# Altium PCB S52最小系统.PcbDoc (part 5 of 9)
Units mm, origin at the board's own origin, x right, y up, seen from the top; angles counter-clockwise.
Board outline 152.4 x 101.6 mm, 2 copper layers (Top Layer, Bottom Layer); 29 components, 53 nets, 176 pads, 2 vias.
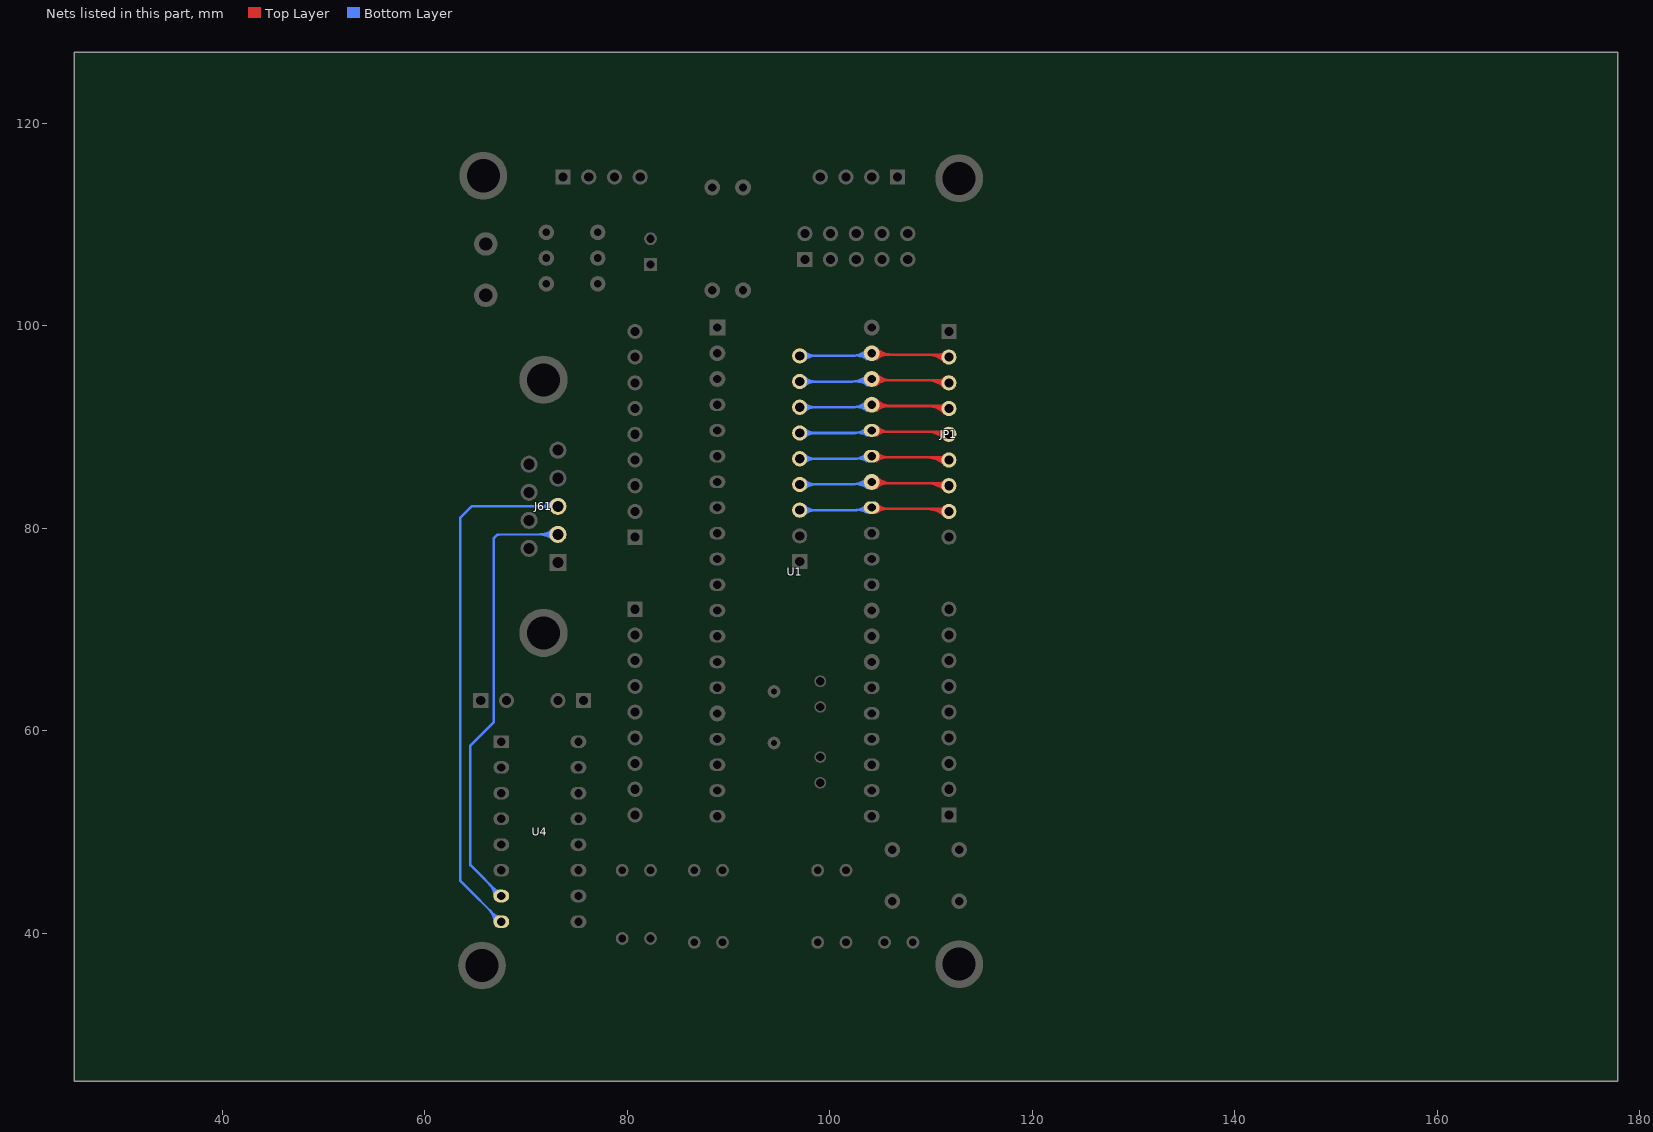
[diagram p5: the nets of this part, all layers, seen from the top]

## Via types
v1: diameter 1.27, hole 0.711, Top Layer to Bottom Layer, 2 vias

## Nets (pads, with @x,y where several pads share a name; then routed paths per layer and width w, separated by ;. In a path a pad name is that pad's centre, name@x,y a point inside that pad or via, vN(x,y) a via of type N, cw(c..) or ccw(c..) an arc to the next point about the centre after c; other vN are vias at no path point) (continued)
NetJ61_2: J61.2 U4.7 | length 115.4
  Bottom Layer w0.254: U4.7@67.56,43.687 64.516,46.731 64.516,58.547 66.802,60.833 66.802,78.994 67.183,79.375 67.31,79.375 J61.2@73.15,79.399 ; 66.433,44.814 cw(c65.305,43.687) U4.7@66.9,43.687 ; 66.433,44.814 cw(c65.305,43.687) U4.7@66.9,43.687 ; 66.433,44.814 cw(c65.305,43.687) U4.7@66.9,43.687 ; 66.433,44.814 cw(c65.305,43.687) U4.7@66.9,43.687 ; 66.433,44.814 cw(c65.305,43.687) U4.7@66.9,43.687 ; 66.433,44.814 cw(c65.305,43.687) U4.7@66.9,43.687 ; 66.433,44.814 cw(c65.305,43.687) U4.7@66.9,43.687 ; 66.433,44.814 cw(c65.305,43.687) U4.7@66.9,43.687 ; 66.433,44.814 cw(c65.305,43.687) U4.7@66.9,43.687 ; 66.433,44.814 cw(c65.305,43.687) U4.7@66.9,43.687 ; 66.825,44.422 ccw(c67.398,44.995) U4.7@67.398,44.185 ; 66.825,44.422 ccw(c67.398,44.995) U4.7@67.398,44.185 ; 66.825,44.422 ccw(c67.398,44.995) U4.7@67.398,44.185 ; 66.825,44.422 ccw(c67.398,44.995) U4.7@67.398,44.185 ; 66.825,44.422 ccw(c67.398,44.995) U4.7@67.398,44.185 ; 66.825,44.422 ccw(c67.398,44.995) U4.7@67.398,44.185 ; 66.825,44.422 ccw(c67.398,44.995) U4.7@67.398,44.185 ; 66.825,44.422 ccw(c67.398,44.995) U4.7@67.398,44.185 ; 66.825,44.422 ccw(c67.398,44.995) U4.7@67.398,44.185 ; 66.825,44.422 ccw(c67.398,44.995) U4.7@67.398,44.185 ; 66.866,44.381 cw(c66.173,43.687) U4.7@67.154,43.687 ; 66.866,44.381 cw(c66.173,43.687) U4.7@67.154,43.687 ; 66.866,44.381 cw(c66.173,43.687) U4.7@67.154,43.687 ; 66.866,44.381 cw(c66.173,43.687) U4.7@67.154,43.687 ; 66.866,44.381 cw(c66.173,43.687) U4.7@67.154,43.687 ; 66.866,44.381 cw(c66.173,43.687) U4.7@67.154,43.687 ; 66.866,44.381 cw(c66.173,43.687) U4.7@67.154,43.687 ; 66.866,44.381 cw(c66.173,43.687) U4.7@67.154,43.687 ; 66.866,44.381 cw(c66.173,43.687) U4.7@67.154,43.687 ; 66.866,44.381 cw(c66.173,43.687) U4.7@67.154,43.687 ; 71.417,79.392 cw(c71.424,77.658) J61.2@72.644,78.889 ; 71.417,79.392 ccw(c71.409,81.125) J61.2@72.64,79.905 ; 71.417,79.392 cw(c71.424,77.658) J61.2@72.644,78.889 ; 71.417,79.392 ccw(c71.409,81.125) J61.2@72.64,79.905 ; 71.417,79.392 cw(c71.424,77.658) J61.2@72.644,78.889 ; 71.417,79.392 ccw(c71.409,81.125) J61.2@72.64,79.905 ; 71.417,79.392 ccw(c71.409,81.125) J61.2@72.64,79.905 ; 71.417,79.392 cw(c71.424,77.658) J61.2@72.644,78.889 ; 71.417,79.392 ccw(c71.409,81.125) J61.2@72.64,79.905 ; 71.417,79.392 cw(c71.424,77.658) J61.2@72.644,78.889 ; 71.417,79.392 ccw(c71.409,81.125) J61.2@72.64,79.905 ; 71.417,79.392 cw(c71.424,77.658) J61.2@72.644,78.889 ; 71.417,79.392 ccw(c71.409,81.125) J61.2@72.64,79.905 ; 71.417,79.392 cw(c71.424,77.658) J61.2@72.644,78.889 ; 71.417,79.392 ccw(c71.409,81.125) J61.2@72.64,79.905 ; 71.417,79.392 cw(c71.424,77.658) J61.2@72.644,78.889 ; 71.417,79.392 ccw(c71.409,81.125) J61.2@72.64,79.905 ; 71.417,79.392 cw(c71.424,77.658) J61.2@72.644,78.889 ; 71.417,79.392 ccw(c71.409,81.125) J61.2@72.64,79.905 ; 71.417,79.392 cw(c71.424,77.658) J61.2@72.644,78.889 ; 72.03,79.394 cw(c72.034,78.274) J61.2@72.823,79.07 ; 72.03,79.394 ccw(c72.025,80.515) J61.2@72.821,79.726 ; 72.03,79.394 cw(c72.034,78.274) J61.2@72.823,79.07 ; 72.03,79.394 ccw(c72.025,80.515) J61.2@72.821,79.726 ; 72.03,79.394 cw(c72.034,78.274) J61.2@72.823,79.07 ; 72.03,79.394 ccw(c72.025,80.515) J61.2@72.821,79.726 ; 72.03,79.394 ccw(c72.025,80.515) J61.2@72.821,79.726 ; 72.03,79.394 cw(c72.034,78.274) J61.2@72.823,79.07 ; 72.03,79.394 ccw(c72.025,80.515) J61.2@72.821,79.726 ; 72.03,79.394 cw(c72.034,78.274) J61.2@72.823,79.07 ; 72.03,79.394 ccw(c72.025,80.515) J61.2@72.821,79.726 ; 72.03,79.394 cw(c72.034,78.274) J61.2@72.823,79.07 ; 72.03,79.394 ccw(c72.025,80.515) J61.2@72.821,79.726 ; 72.03,79.394 cw(c72.034,78.274) J61.2@72.823,79.07 ; 72.03,79.394 ccw(c72.025,80.515) J61.2@72.821,79.726 ; 72.03,79.394 cw(c72.034,78.274) J61.2@72.823,79.07 ; 72.03,79.394 ccw(c72.025,80.515) J61.2@72.821,79.726 ; 72.03,79.394 cw(c72.034,78.274) J61.2@72.823,79.07 ; 72.03,79.394 ccw(c72.025,80.515) J61.2@72.821,79.726 ; 72.03,79.394 cw(c72.034,78.274) J61.2@72.823,79.07
NetJ61_3: J61.3 U4.8 | length 123.1
  Bottom Layer w0.254: U4.8@67.56,41.147 63.5,45.207 63.5,81.026 64.643,82.169 J61.3@73.15,82.169 ; 66.433,42.274 cw(c65.305,41.147) U4.8@66.9,41.147 ; 66.433,42.274 cw(c65.305,41.147) U4.8@66.9,41.147 ; 66.433,42.274 cw(c65.305,41.147) U4.8@66.9,41.147 ; 66.433,42.274 cw(c65.305,41.147) U4.8@66.9,41.147 ; 66.433,42.274 cw(c65.305,41.147) U4.8@66.9,41.147 ; 66.433,42.274 cw(c65.305,41.147) U4.8@66.9,41.147 ; 66.433,42.274 cw(c65.305,41.147) U4.8@66.9,41.147 ; 66.433,42.274 cw(c65.305,41.147) U4.8@66.9,41.147 ; 66.433,42.274 cw(c65.305,41.147) U4.8@66.9,41.147 ; 66.433,42.274 cw(c65.305,41.147) U4.8@66.9,41.147 ; 66.825,41.882 ccw(c67.398,42.455) U4.8@67.398,41.645 ; 66.825,41.882 ccw(c67.398,42.455) U4.8@67.398,41.645 ; 66.825,41.882 ccw(c67.398,42.455) U4.8@67.398,41.645 ; 66.825,41.882 ccw(c67.398,42.455) U4.8@67.398,41.645 ; 66.825,41.882 ccw(c67.398,42.455) U4.8@67.398,41.645 ; 66.825,41.882 ccw(c67.398,42.455) U4.8@67.398,41.645 ; 66.825,41.882 ccw(c67.398,42.455) U4.8@67.398,41.645 ; 66.825,41.882 ccw(c67.398,42.455) U4.8@67.398,41.645 ; 66.825,41.882 ccw(c67.398,42.455) U4.8@67.398,41.645 ; 66.825,41.882 ccw(c67.398,42.455) U4.8@67.398,41.645 ; 66.866,41.841 cw(c66.173,41.147) U4.8@67.154,41.147 ; 66.866,41.841 cw(c66.173,41.147) U4.8@67.154,41.147 ; 66.866,41.841 cw(c66.173,41.147) U4.8@67.154,41.147 ; 66.866,41.841 cw(c66.173,41.147) U4.8@67.154,41.147 ; 66.866,41.841 cw(c66.173,41.147) U4.8@67.154,41.147 ; 66.866,41.841 cw(c66.173,41.147) U4.8@67.154,41.147 ; 66.866,41.841 cw(c66.173,41.147) U4.8@67.154,41.147 ; 66.866,41.841 cw(c66.173,41.147) U4.8@67.154,41.147 ; 66.866,41.841 cw(c66.173,41.147) U4.8@67.154,41.147 ; 66.866,41.841 cw(c66.173,41.147) U4.8@67.154,41.147 ; 71.417,82.169 cw(c71.417,80.436) J61.3@72.642,81.661 ; 71.417,82.169 ccw(c71.417,83.902) J61.3@72.642,82.677 ; 71.417,82.169 cw(c71.417,80.436) J61.3@72.642,81.661 ; 71.417,82.169 ccw(c71.417,83.902) J61.3@72.642,82.677 ; 71.417,82.169 cw(c71.417,80.436) J61.3@72.642,81.661 ; 71.417,82.169 ccw(c71.417,83.902) J61.3@72.642,82.677 ; 71.417,82.169 ccw(c71.417,83.902) J61.3@72.642,82.677 ; 71.417,82.169 cw(c71.417,80.436) J61.3@72.642,81.661 ; 71.417,82.169 ccw(c71.417,83.902) J61.3@72.642,82.677 ; 71.417,82.169 cw(c71.417,80.436) J61.3@72.642,81.661 ; 71.417,82.169 ccw(c71.417,83.902) J61.3@72.642,82.677 ; 71.417,82.169 cw(c71.417,80.436) J61.3@72.642,81.661 ; 71.417,82.169 ccw(c71.417,83.902) J61.3@72.642,82.677 ; 71.417,82.169 cw(c71.417,80.436) J61.3@72.642,81.661 ; 71.417,82.169 ccw(c71.417,83.902) J61.3@72.642,82.677 ; 71.417,82.169 cw(c71.417,80.436) J61.3@72.642,81.661 ; 71.417,82.169 ccw(c71.417,83.902) J61.3@72.642,82.677 ; 71.417,82.169 cw(c71.417,80.436) J61.3@72.642,81.661 ; 71.417,82.169 ccw(c71.417,83.902) J61.3@72.642,82.677 ; 71.417,82.169 cw(c71.417,80.436) J61.3@72.642,81.661 ; 72.03,82.169 cw(c72.03,81.049) J61.3@72.822,81.841 ; 72.03,82.169 ccw(c72.03,83.289) J61.3@72.822,82.497 ; 72.03,82.169 cw(c72.03,81.049) J61.3@72.822,81.841 ; 72.03,82.169 ccw(c72.03,83.289) J61.3@72.822,82.497 ; 72.03,82.169 cw(c72.03,81.049) J61.3@72.822,81.841 ; 72.03,82.169 ccw(c72.03,83.289) J61.3@72.822,82.497 ; 72.03,82.169 ccw(c72.03,83.289) J61.3@72.822,82.497 ; 72.03,82.169 cw(c72.03,81.049) J61.3@72.822,81.841 ; 72.03,82.169 ccw(c72.03,83.289) J61.3@72.822,82.497 ; 72.03,82.169 cw(c72.03,81.049) J61.3@72.822,81.841 ; 72.03,82.169 ccw(c72.03,83.289) J61.3@72.822,82.497 ; 72.03,82.169 cw(c72.03,81.049) J61.3@72.822,81.841 ; 72.03,82.169 ccw(c72.03,83.289) J61.3@72.822,82.497 ; 72.03,82.169 cw(c72.03,81.049) J61.3@72.822,81.841 ; 72.03,82.169 ccw(c72.03,83.289) J61.3@72.822,82.497 ; 72.03,82.169 cw(c72.03,81.049) J61.3@72.822,81.841 ; 72.03,82.169 ccw(c72.03,83.289) J61.3@72.822,82.497 ; 72.03,82.169 cw(c72.03,81.049) J61.3@72.822,81.841 ; 72.03,82.169 ccw(c72.03,83.289) J61.3@72.822,82.497 ; 72.03,82.169 cw(c72.03,81.049) J61.3@72.822,81.841
NetJP1_2: ?.9 JP1.2 U1.39 | length 116.7
  Top Layer w0.254: U1.39@104.136,97.154 111.507,97.154 JP1.2@111.76,96.901 ; U1.39@104.424,96.867 cw(c105.117,96.173) 105.117,97.154 ; U1.39@104.424,96.867 cw(c105.117,96.173) 105.117,97.154 ; U1.39@104.424,96.867 cw(c105.117,96.173) 105.117,97.154 ; U1.39@104.424,96.867 cw(c105.117,96.173) 105.117,97.154 ; U1.39@104.424,96.867 cw(c105.117,96.173) 105.117,97.154 ; U1.39@104.424,96.867 cw(c105.117,96.173) 105.117,97.154 ; U1.39@104.424,97.441 ccw(c105.117,98.135) 105.117,97.154 ; U1.39@104.424,97.441 ccw(c105.117,98.135) 105.117,97.154 ; U1.39@104.424,97.441 ccw(c105.117,98.135) 105.117,97.154 ; U1.39@104.424,97.441 ccw(c105.117,98.135) 105.117,97.154 ; U1.39@104.424,97.441 ccw(c105.117,98.135) 105.117,97.154 ; U1.39@104.424,97.441 ccw(c105.117,98.135) 105.117,97.154 ; U1.39@104.424,97.568 ccw(c105.424,98.569) 105.424,97.154 ; U1.39@104.424,97.568 ccw(c105.424,98.569) 105.424,97.154 ; U1.39@104.424,97.568 ccw(c105.424,98.569) 105.424,97.154 ; U1.39@104.424,97.568 ccw(c105.424,98.569) 105.424,97.154 ; U1.39@104.603,96.687 cw(c105.731,95.56) 105.731,97.154 ; U1.39@104.603,96.687 cw(c105.731,95.56) 105.731,97.154 ; U1.39@104.603,96.687 cw(c105.731,95.56) 105.731,97.154 ; U1.39@104.603,96.687 cw(c105.731,95.56) 105.731,97.154 ; U1.39@104.603,96.687 cw(c105.731,95.56) 105.731,97.154 ; U1.39@104.603,96.687 cw(c105.731,95.56) 105.731,97.154 ; U1.39@104.603,96.814 cw(c105.424,95.993) 105.424,97.154 ; U1.39@104.603,96.814 cw(c105.424,95.993) 105.424,97.154 ; U1.39@104.603,96.814 cw(c105.424,95.993) 105.424,97.154 ; U1.39@104.603,96.814 cw(c105.424,95.993) 105.424,97.154 ; U1.39@104.603,97.621 ccw(c105.731,98.748) 105.731,97.154 ; U1.39@104.603,97.621 ccw(c105.731,98.748) 105.731,97.154 ; U1.39@104.603,97.621 ccw(c105.731,98.748) 105.731,97.154 ; U1.39@104.603,97.621 ccw(c105.731,98.748) 105.731,97.154 ; U1.39@104.603,97.621 ccw(c105.731,98.748) 105.731,97.154 ; U1.39@104.603,97.621 ccw(c105.731,98.748) 105.731,97.154 ; U1.39@104.603,97.748 ccw(c106.037,99.182) 106.037,97.154 ; U1.39@104.603,97.748 ccw(c106.037,99.182) 106.037,97.154 ; U1.39@104.603,97.748 ccw(c106.037,99.182) 106.037,97.154 ; U1.39@104.603,97.748 ccw(c106.037,99.182) 106.037,97.154 ; 109.645,97.154 cw(c109.645,94.786) JP1.2@111.319,96.46 ; 109.645,97.154 cw(c109.645,94.786) JP1.2@111.319,96.46 ; 109.645,97.154 cw(c109.645,94.786) JP1.2@111.319,96.46 ; 109.645,97.154 cw(c109.645,94.786) JP1.2@111.319,96.46 ; 109.645,97.154 cw(c109.645,94.786) JP1.2@111.319,96.46 ; 109.645,97.154 cw(c109.645,94.786) JP1.2@111.319,96.46 ; 109.645,97.154 cw(c109.645,94.786) JP1.2@111.319,96.46 ; 109.645,97.154 cw(c109.645,94.786) JP1.2@111.319,96.46 ; 109.645,97.154 cw(c109.645,94.786) JP1.2@111.319,96.46 ; 109.645,97.154 cw(c109.645,94.786) JP1.2@111.319,96.46 ; 110.258,97.154 cw(c110.258,95.399) JP1.2@111.499,96.64 ; 110.258,97.154 cw(c110.258,95.399) JP1.2@111.499,96.64 ; 110.258,97.154 cw(c110.258,95.399) JP1.2@111.499,96.64 ; 110.258,97.154 cw(c110.258,95.399) JP1.2@111.499,96.64 ; 110.258,97.154 cw(c110.258,95.399) JP1.2@111.499,96.64 ; 110.258,97.154 cw(c110.258,95.399) JP1.2@111.499,96.64 ; 110.258,97.154 cw(c110.258,95.399) JP1.2@111.499,96.64 ; 110.258,97.154 cw(c110.258,95.399) JP1.2@111.499,96.64 ; 110.258,97.154 cw(c110.258,95.399) JP1.2@111.499,96.64 ; 110.258,97.154 cw(c110.258,95.399) JP1.2@111.499,96.64 ; 110.867,97.154 ccw(c110.867,97.794) JP1.2@111.319,97.342 ; 110.867,97.154 ccw(c110.867,97.794) JP1.2@111.319,97.342 ; 110.867,97.154 ccw(c110.867,97.794) JP1.2@111.319,97.342 ; 110.867,97.154 ccw(c110.867,97.794) JP1.2@111.319,97.342 ; 110.867,97.154 ccw(c110.867,97.794) JP1.2@111.319,97.342 ; 110.867,97.154 ccw(c110.867,97.794) JP1.2@111.319,97.342 ; 110.867,97.154 ccw(c110.867,97.794) JP1.2@111.319,97.342 ; 110.867,97.154 ccw(c110.867,97.794) JP1.2@111.319,97.342 ; 110.867,97.154 ccw(c110.867,97.794) JP1.2@111.319,97.342 ; 110.867,97.154 ccw(c110.867,97.794) JP1.2@111.319,97.342 ; 110.872,97.154 cw(c110.872,96.013) JP1.2@111.679,96.82 ; 110.872,97.154 cw(c110.872,96.013) JP1.2@111.679,96.82 ; 110.872,97.154 cw(c110.872,96.013) JP1.2@111.679,96.82 ; 110.872,97.154 cw(c110.872,96.013) JP1.2@111.679,96.82 ; 110.872,97.154 cw(c110.872,96.013) JP1.2@111.679,96.82 ; 110.872,97.154 cw(c110.872,96.013) JP1.2@111.679,96.82 ; 110.872,97.154 cw(c110.872,96.013) JP1.2@111.679,96.82 ; 110.872,97.154 cw(c110.872,96.013) JP1.2@111.679,96.82 ; 110.872,97.154 cw(c110.872,96.013) JP1.2@111.679,96.82 ; 110.872,97.154 cw(c110.872,96.013) JP1.2@111.679,96.82
  Bottom Layer w0.254: ?.9@97.028,97.028 102.238,97.028 ccw(c102.238,99.053) U1.39@103.669,97.621 ; 102.846,97.028 cw(c102.846,95.864) U1.39@103.669,96.687 ; 102.851,97.028 ccw(c102.851,98.439) U1.39@103.849,97.441 ; ?.9@97.289,96.767 cw(c97.919,96.137) 97.919,97.028 ; ?.9@97.289,96.767 cw(c97.919,96.137) 97.919,97.028 ; ?.9@97.289,96.767 cw(c97.919,96.137) 97.919,97.028 ; ?.9@97.289,96.767 cw(c97.919,96.137) 97.919,97.028 ; ?.9@97.289,97.289 ccw(c97.919,97.919) 97.919,97.028 ; ?.9@97.289,97.289 ccw(c97.919,97.919) 97.919,97.028 ; ?.9@97.289,97.289 ccw(c97.919,97.919) 97.919,97.028 ; ?.9@97.289,97.289 ccw(c97.919,97.919) 97.919,97.028 ; ?.9@97.469,96.587 cw(c98.532,95.524) 98.532,97.028 ; ?.9@97.469,96.587 cw(c98.532,95.524) 98.532,97.028 ; ?.9@97.469,96.587 cw(c98.532,95.524) 98.532,97.028 ; ?.9@97.469,96.587 cw(c98.532,95.524) 98.532,97.028 ; ?.9@97.469,97.469 ccw(c98.532,98.532) 98.532,97.028 ; ?.9@97.469,97.469 ccw(c98.532,98.532) 98.532,97.028 ; ?.9@97.469,97.469 ccw(c98.532,98.532) 98.532,97.028 ; ?.9@97.469,97.469 ccw(c98.532,98.532) 98.532,97.028
NetJP1_3: ?.8 JP1.3 U1.38 | length 116.7
  Top Layer w0.254: U1.38@104.136,94.614 111.507,94.614 JP1.3@111.76,94.361 ; U1.38@104.424,94.327 cw(c105.117,93.633) 105.117,94.614 ; U1.38@104.424,94.327 cw(c105.117,93.633) 105.117,94.614 ; U1.38@104.424,94.327 cw(c105.117,93.633) 105.117,94.614 ; U1.38@104.424,94.327 cw(c105.117,93.633) 105.117,94.614 ; U1.38@104.424,94.327 cw(c105.117,93.633) 105.117,94.614 ; U1.38@104.424,94.327 cw(c105.117,93.633) 105.117,94.614 ; U1.38@104.424,94.901 ccw(c105.117,95.595) 105.117,94.614 ; U1.38@104.424,94.901 ccw(c105.117,95.595) 105.117,94.614 ; U1.38@104.424,94.901 ccw(c105.117,95.595) 105.117,94.614 ; U1.38@104.424,94.901 ccw(c105.117,95.595) 105.117,94.614 ; U1.38@104.424,94.901 ccw(c105.117,95.595) 105.117,94.614 ; U1.38@104.424,94.901 ccw(c105.117,95.595) 105.117,94.614 ; U1.38@104.424,95.028 ccw(c105.424,96.029) 105.424,94.614 ; U1.38@104.424,95.028 ccw(c105.424,96.029) 105.424,94.614 ; U1.38@104.424,95.028 ccw(c105.424,96.029) 105.424,94.614 ; U1.38@104.424,95.028 ccw(c105.424,96.029) 105.424,94.614 ; U1.38@104.603,94.147 cw(c105.731,93.02) 105.731,94.614 ; U1.38@104.603,94.147 cw(c105.731,93.02) 105.731,94.614 ; U1.38@104.603,94.147 cw(c105.731,93.02) 105.731,94.614 ; U1.38@104.603,94.147 cw(c105.731,93.02) 105.731,94.614 ; U1.38@104.603,94.147 cw(c105.731,93.02) 105.731,94.614 ; U1.38@104.603,94.147 cw(c105.731,93.02) 105.731,94.614 ; U1.38@104.603,94.274 cw(c105.424,93.453) 105.424,94.614 ; U1.38@104.603,94.274 cw(c105.424,93.453) 105.424,94.614 ; U1.38@104.603,94.274 cw(c105.424,93.453) 105.424,94.614 ; U1.38@104.603,94.274 cw(c105.424,93.453) 105.424,94.614 ; U1.38@104.603,95.081 ccw(c105.731,96.208) 105.731,94.614 ; U1.38@104.603,95.081 ccw(c105.731,96.208) 105.731,94.614 ; U1.38@104.603,95.081 ccw(c105.731,96.208) 105.731,94.614 ; U1.38@104.603,95.081 ccw(c105.731,96.208) 105.731,94.614 ; U1.38@104.603,95.081 ccw(c105.731,96.208) 105.731,94.614 ; U1.38@104.603,95.081 ccw(c105.731,96.208) 105.731,94.614 ; U1.38@104.603,95.208 ccw(c106.037,96.642) 106.037,94.614 ; U1.38@104.603,95.208 ccw(c106.037,96.642) 106.037,94.614 ; U1.38@104.603,95.208 ccw(c106.037,96.642) 106.037,94.614 ; U1.38@104.603,95.208 ccw(c106.037,96.642) 106.037,94.614 ; 109.645,94.614 cw(c109.645,92.246) JP1.3@111.319,93.92 ; 109.645,94.614 cw(c109.645,92.246) JP1.3@111.319,93.92 ; 109.645,94.614 cw(c109.645,92.246) JP1.3@111.319,93.92 ; 109.645,94.614 cw(c109.645,92.246) JP1.3@111.319,93.92 ; 109.645,94.614 cw(c109.645,92.246) JP1.3@111.319,93.92 ; 109.645,94.614 cw(c109.645,92.246) JP1.3@111.319,93.92 ; 109.645,94.614 cw(c109.645,92.246) JP1.3@111.319,93.92 ; 109.645,94.614 cw(c109.645,92.246) JP1.3@111.319,93.92 ; 109.645,94.614 cw(c109.645,92.246) JP1.3@111.319,93.92 ; 109.645,94.614 cw(c109.645,92.246) JP1.3@111.319,93.92 ; 110.258,94.614 cw(c110.258,92.859) JP1.3@111.499,94.1 ; 110.258,94.614 cw(c110.258,92.859) JP1.3@111.499,94.1 ; 110.258,94.614 cw(c110.258,92.859) JP1.3@111.499,94.1 ; 110.258,94.614 cw(c110.258,92.859) JP1.3@111.499,94.1 ; 110.258,94.614 cw(c110.258,92.859) JP1.3@111.499,94.1 ; 110.258,94.614 cw(c110.258,92.859) JP1.3@111.499,94.1 ; 110.258,94.614 cw(c110.258,92.859) JP1.3@111.499,94.1 ; 110.258,94.614 cw(c110.258,92.859) JP1.3@111.499,94.1 ; 110.258,94.614 cw(c110.258,92.859) JP1.3@111.499,94.1 ; 110.258,94.614 cw(c110.258,92.859) JP1.3@111.499,94.1 ; 110.867,94.614 ccw(c110.867,95.254) JP1.3@111.319,94.802 ; 110.867,94.614 ccw(c110.867,95.254) JP1.3@111.319,94.802 ; 110.867,94.614 ccw(c110.867,95.254) JP1.3@111.319,94.802 ; 110.867,94.614 ccw(c110.867,95.254) JP1.3@111.319,94.802 ; 110.867,94.614 ccw(c110.867,95.254) JP1.3@111.319,94.802 ; 110.867,94.614 ccw(c110.867,95.254) JP1.3@111.319,94.802 ; 110.867,94.614 ccw(c110.867,95.254) JP1.3@111.319,94.802 ; 110.867,94.614 ccw(c110.867,95.254) JP1.3@111.319,94.802 ; 110.867,94.614 ccw(c110.867,95.254) JP1.3@111.319,94.802 ; 110.867,94.614 ccw(c110.867,95.254) JP1.3@111.319,94.802 ; 110.872,94.614 cw(c110.872,93.473) JP1.3@111.679,94.28 ; 110.872,94.614 cw(c110.872,93.473) JP1.3@111.679,94.28 ; 110.872,94.614 cw(c110.872,93.473) JP1.3@111.679,94.28 ; 110.872,94.614 cw(c110.872,93.473) JP1.3@111.679,94.28 ; 110.872,94.614 cw(c110.872,93.473) JP1.3@111.679,94.28 ; 110.872,94.614 cw(c110.872,93.473) JP1.3@111.679,94.28 ; 110.872,94.614 cw(c110.872,93.473) JP1.3@111.679,94.28 ; 110.872,94.614 cw(c110.872,93.473) JP1.3@111.679,94.28 ; 110.872,94.614 cw(c110.872,93.473) JP1.3@111.679,94.28 ; 110.872,94.614 cw(c110.872,93.473) JP1.3@111.679,94.28
  Bottom Layer w0.254: ?.8@97.028,94.488 102.238,94.488 ccw(c102.238,96.513) U1.38@103.669,95.081 ; 102.846,94.488 cw(c102.846,93.324) U1.38@103.669,94.147 ; 102.851,94.488 ccw(c102.851,95.899) U1.38@103.849,94.901 ; ?.8@97.289,94.227 cw(c97.919,93.597) 97.919,94.488 ; ?.8@97.289,94.227 cw(c97.919,93.597) 97.919,94.488 ; ?.8@97.289,94.227 cw(c97.919,93.597) 97.919,94.488 ; ?.8@97.289,94.227 cw(c97.919,93.597) 97.919,94.488 ; ?.8@97.289,94.749 ccw(c97.919,95.379) 97.919,94.488 ; ?.8@97.289,94.749 ccw(c97.919,95.379) 97.919,94.488 ; ?.8@97.289,94.749 ccw(c97.919,95.379) 97.919,94.488 ; ?.8@97.289,94.749 ccw(c97.919,95.379) 97.919,94.488 ; ?.8@97.469,94.047 cw(c98.532,92.984) 98.532,94.488 ; ?.8@97.469,94.047 cw(c98.532,92.984) 98.532,94.488 ; ?.8@97.469,94.047 cw(c98.532,92.984) 98.532,94.488 ; ?.8@97.469,94.047 cw(c98.532,92.984) 98.532,94.488 ; ?.8@97.469,94.929 ccw(c98.532,95.992) 98.532,94.488 ; ?.8@97.469,94.929 ccw(c98.532,95.992) 98.532,94.488 ; ?.8@97.469,94.929 ccw(c98.532,95.992) 98.532,94.488 ; ?.8@97.469,94.929 ccw(c98.532,95.992) 98.532,94.488
NetJP1_4: ?.7 JP1.4 U1.37 | length 116.9
  Top Layer w0.254: U1.37@104.136,92.074 111.507,92.074 JP1.4@111.76,91.821 ; U1.37@104.424,91.787 cw(c105.117,91.093) 105.117,92.074 ; U1.37@104.424,91.787 cw(c105.117,91.093) 105.117,92.074 ; U1.37@104.424,91.787 cw(c105.117,91.093) 105.117,92.074 ; U1.37@104.424,91.787 cw(c105.117,91.093) 105.117,92.074 ; U1.37@104.424,91.787 cw(c105.117,91.093) 105.117,92.074 ; U1.37@104.424,91.787 cw(c105.117,91.093) 105.117,92.074 ; U1.37@104.424,92.361 ccw(c105.117,93.055) 105.117,92.074 ; U1.37@104.424,92.361 ccw(c105.117,93.055) 105.117,92.074 ; U1.37@104.424,92.361 ccw(c105.117,93.055) 105.117,92.074 ; U1.37@104.424,92.361 ccw(c105.117,93.055) 105.117,92.074 ; U1.37@104.424,92.361 ccw(c105.117,93.055) 105.117,92.074 ; U1.37@104.424,92.361 ccw(c105.117,93.055) 105.117,92.074 ; U1.37@104.424,92.488 ccw(c105.424,93.489) 105.424,92.074 ; U1.37@104.424,92.488 ccw(c105.424,93.489) 105.424,92.074 ; U1.37@104.424,92.488 ccw(c105.424,93.489) 105.424,92.074 ; U1.37@104.424,92.488 ccw(c105.424,93.489) 105.424,92.074 ; U1.37@104.603,91.607 cw(c105.731,90.48) 105.731,92.074 ; U1.37@104.603,91.607 cw(c105.731,90.48) 105.731,92.074 ; U1.37@104.603,91.607 cw(c105.731,90.48) 105.731,92.074 ; U1.37@104.603,91.607 cw(c105.731,90.48) 105.731,92.074 ; U1.37@104.603,91.607 cw(c105.731,90.48) 105.731,92.074 ; U1.37@104.603,91.607 cw(c105.731,90.48) 105.731,92.074 ; U1.37@104.603,91.734 cw(c105.424,90.913) 105.424,92.074 ; U1.37@104.603,91.734 cw(c105.424,90.913) 105.424,92.074 ; U1.37@104.603,91.734 cw(c105.424,90.913) 105.424,92.074 ; U1.37@104.603,91.734 cw(c105.424,90.913) 105.424,92.074 ; U1.37@104.603,92.541 ccw(c105.731,93.668) 105.731,92.074 ; U1.37@104.603,92.541 ccw(c105.731,93.668) 105.731,92.074 ; U1.37@104.603,92.541 ccw(c105.731,93.668) 105.731,92.074 ; U1.37@104.603,92.541 ccw(c105.731,93.668) 105.731,92.074 ; U1.37@104.603,92.541 ccw(c105.731,93.668) 105.731,92.074 ; U1.37@104.603,92.541 ccw(c105.731,93.668) 105.731,92.074 ; U1.37@104.603,92.668 ccw(c106.037,94.102) 106.037,92.074 ; U1.37@104.603,92.668 ccw(c106.037,94.102) 106.037,92.074 ; U1.37@104.603,92.668 ccw(c106.037,94.102) 106.037,92.074 ; U1.37@104.603,92.668 ccw(c106.037,94.102) 106.037,92.074 ; 109.645,92.074 cw(c109.645,89.706) JP1.4@111.319,91.38 ; 109.645,92.074 cw(c109.645,89.706) JP1.4@111.319,91.38 ; 109.645,92.074 cw(c109.645,89.706) JP1.4@111.319,91.38 ; 109.645,92.074 cw(c109.645,89.706) JP1.4@111.319,91.38 ; 109.645,92.074 cw(c109.645,89.706) JP1.4@111.319,91.38 ; 109.645,92.074 cw(c109.645,89.706) JP1.4@111.319,91.38 ; 109.645,92.074 cw(c109.645,89.706) JP1.4@111.319,91.38 ; 109.645,92.074 cw(c109.645,89.706) JP1.4@111.319,91.38 ; 109.645,92.074 cw(c109.645,89.706) JP1.4@111.319,91.38 ; 109.645,92.074 cw(c109.645,89.706) JP1.4@111.319,91.38 ; 110.258,92.074 cw(c110.258,90.319) JP1.4@111.499,91.56 ; 110.258,92.074 cw(c110.258,90.319) JP1.4@111.499,91.56 ; 110.258,92.074 cw(c110.258,90.319) JP1.4@111.499,91.56 ; 110.258,92.074 cw(c110.258,90.319) JP1.4@111.499,91.56 ; 110.258,92.074 cw(c110.258,90.319) JP1.4@111.499,91.56 ; 110.258,92.074 cw(c110.258,90.319) JP1.4@111.499,91.56 ; 110.258,92.074 cw(c110.258,90.319) JP1.4@111.499,91.56 ; 110.258,92.074 cw(c110.258,90.319) JP1.4@111.499,91.56 ; 110.258,92.074 cw(c110.258,90.319) JP1.4@111.499,91.56 ; 110.258,92.074 cw(c110.258,90.319) JP1.4@111.499,91.56 ; 110.867,92.074 ccw(c110.867,92.714) JP1.4@111.319,92.262 ; 110.867,92.074 ccw(c110.867,92.714) JP1.4@111.319,92.262 ; 110.867,92.074 ccw(c110.867,92.714) JP1.4@111.319,92.262 ; 110.867,92.074 ccw(c110.867,92.714) JP1.4@111.319,92.262 ; 110.867,92.074 ccw(c110.867,92.714) JP1.4@111.319,92.262 ; 110.867,92.074 ccw(c110.867,92.714) JP1.4@111.319,92.262 ; 110.867,92.074 ccw(c110.867,92.714) JP1.4@111.319,92.262 ; 110.867,92.074 ccw(c110.867,92.714) JP1.4@111.319,92.262 ; 110.867,92.074 ccw(c110.867,92.714) JP1.4@111.319,92.262 ; 110.867,92.074 ccw(c110.867,92.714) JP1.4@111.319,92.262 ; 110.872,92.074 cw(c110.872,90.933) JP1.4@111.679,91.74 ; 110.872,92.074 cw(c110.872,90.933) JP1.4@111.679,91.74 ; 110.872,92.074 cw(c110.872,90.933) JP1.4@111.679,91.74 ; 110.872,92.074 cw(c110.872,90.933) JP1.4@111.679,91.74 ; 110.872,92.074 cw(c110.872,90.933) JP1.4@111.679,91.74 ; 110.872,92.074 cw(c110.872,90.933) JP1.4@111.679,91.74 ; 110.872,92.074 cw(c110.872,90.933) JP1.4@111.679,91.74 ; 110.872,92.074 cw(c110.872,90.933) JP1.4@111.679,91.74 ; 110.872,92.074 cw(c110.872,90.933) JP1.4@111.679,91.74 ; 110.872,92.074 cw(c110.872,90.933) JP1.4@111.679,91.74
  Bottom Layer w0.254: ?.7@97.028,91.948 102.238,91.948 ccw(c102.238,93.973) U1.37@103.669,92.541 ; 102.846,91.948 cw(c102.846,90.784) U1.37@103.669,91.607 ; 102.851,91.948 ccw(c102.851,93.359) U1.37@103.849,92.361 ; U1.37@104.01,91.948 U1.37@104.136,92.074 ; ?.7@97.289,91.687 cw(c97.919,91.057) 97.919,91.948 ; ?.7@97.289,91.687 cw(c97.919,91.057) 97.919,91.948 ; ?.7@97.289,91.687 cw(c97.919,91.057) 97.919,91.948 ; ?.7@97.289,91.687 cw(c97.919,91.057) 97.919,91.948 ; ?.7@97.289,92.209 ccw(c97.919,92.839) 97.919,91.948 ; ?.7@97.289,92.209 ccw(c97.919,92.839) 97.919,91.948 ; ?.7@97.289,92.209 ccw(c97.919,92.839) 97.919,91.948 ; ?.7@97.289,92.209 ccw(c97.919,92.839) 97.919,91.948 ; ?.7@97.469,91.507 cw(c98.532,90.444) 98.532,91.948 ; ?.7@97.469,91.507 cw(c98.532,90.444) 98.532,91.948 ; ?.7@97.469,91.507 cw(c98.532,90.444) 98.532,91.948 ; ?.7@97.469,91.507 cw(c98.532,90.444) 98.532,91.948 ; ?.7@97.469,92.389 ccw(c98.532,93.452) 98.532,91.948 ; ?.7@97.469,92.389 ccw(c98.532,93.452) 98.532,91.948 ; ?.7@97.469,92.389 ccw(c98.532,93.452) 98.532,91.948 ; ?.7@97.469,92.389 ccw(c98.532,93.452) 98.532,91.948
NetJP1_5: ?.6 JP1.5 U1.36 | length 99.6
  Top Layer w0.254: U1.36@104.136,89.534 111.507,89.534 JP1.5@111.76,89.281 ; U1.36@104.471,89.834 ccw(c105.194,90.557) 105.194,89.534 ; U1.36@104.471,89.834 ccw(c105.194,90.557) 105.194,89.534 ; U1.36@104.471,89.834 ccw(c105.194,90.557) 105.194,89.534 ; U1.36@104.471,89.834 ccw(c105.194,90.557) 105.194,89.534 ; U1.36@104.651,89.182 cw(c105.501,88.332) 105.501,89.534 ; U1.36@104.651,89.182 cw(c105.501,88.332) 105.501,89.534 ; U1.36@104.651,89.182 cw(c105.501,88.332) 105.501,89.534 ; U1.36@104.651,89.182 cw(c105.501,88.332) 105.501,89.534 ; U1.36@104.651,89.182 cw(c105.501,88.332) 105.501,89.534 ; U1.36@104.651,89.182 cw(c105.501,88.332) 105.501,89.534 ; U1.36@104.651,89.309 cw(c105.194,88.765) 105.194,89.534 ; U1.36@104.651,89.309 cw(c105.194,88.765) 105.194,89.534 ; U1.36@104.651,89.309 cw(c105.194,88.765) 105.194,89.534 ; U1.36@104.651,89.309 cw(c105.194,88.765) 105.194,89.534 ; U1.36@104.651,89.886 ccw(c105.501,90.736) 105.501,89.534 ; U1.36@104.651,89.886 ccw(c105.501,90.736) 105.501,89.534 ; U1.36@104.651,89.886 ccw(c105.501,90.736) 105.501,89.534 ; U1.36@104.651,89.886 ccw(c105.501,90.736) 105.501,89.534 ; U1.36@104.651,89.886 ccw(c105.501,90.736) 105.501,89.534 ; U1.36@104.651,89.886 ccw(c105.501,90.736) 105.501,89.534 ; U1.36@104.651,90.013 ccw(c105.807,91.17) 105.807,89.534 ; U1.36@104.651,90.013 ccw(c105.807,91.17) 105.807,89.534 ; U1.36@104.651,90.013 ccw(c105.807,91.17) 105.807,89.534 ; U1.36@104.651,90.013 ccw(c105.807,91.17) 105.807,89.534 ; 109.645,89.534 cw(c109.645,87.166) JP1.5@111.319,88.84 ; 109.645,89.534 cw(c109.645,87.166) JP1.5@111.319,88.84 ; 109.645,89.534 cw(c109.645,87.166) JP1.5@111.319,88.84 ; 109.645,89.534 cw(c109.645,87.166) JP1.5@111.319,88.84 ; 109.645,89.534 cw(c109.645,87.166) JP1.5@111.319,88.84 ; 109.645,89.534 cw(c109.645,87.166) JP1.5@111.319,88.84 ; 109.645,89.534 cw(c109.645,87.166) JP1.5@111.319,88.84 ; 109.645,89.534 cw(c109.645,87.166) JP1.5@111.319,88.84 ; 109.645,89.534 cw(c109.645,87.166) JP1.5@111.319,88.84 ; 109.645,89.534 cw(c109.645,87.166) JP1.5@111.319,88.84 ; 110.258,89.534 cw(c110.258,87.779) JP1.5@111.499,89.02 ; 110.258,89.534 cw(c110.258,87.779) JP1.5@111.499,89.02 ; 110.258,89.534 cw(c110.258,87.779) JP1.5@111.499,89.02 ; 110.258,89.534 cw(c110.258,87.779) JP1.5@111.499,89.02 ; 110.258,89.534 cw(c110.258,87.779) JP1.5@111.499,89.02 ; 110.258,89.534 cw(c110.258,87.779) JP1.5@111.499,89.02 ; 110.258,89.534 cw(c110.258,87.779) JP1.5@111.499,89.02 ; 110.258,89.534 cw(c110.258,87.779) JP1.5@111.499,89.02 ; 110.258,89.534 cw(c110.258,87.779) JP1.5@111.499,89.02 ; 110.258,89.534 cw(c110.258,87.779) JP1.5@111.499,89.02 ; 110.867,89.534 ccw(c110.867,90.174) JP1.5@111.319,89.722 ; 110.867,89.534 ccw(c110.867,90.174) JP1.5@111.319,89.722 ; 110.867,89.534 ccw(c110.867,90.174) JP1.5@111.319,89.722 ; 110.867,89.534 ccw(c110.867,90.174) JP1.5@111.319,89.722 ; 110.867,89.534 ccw(c110.867,90.174) JP1.5@111.319,89.722 ; 110.867,89.534 ccw(c110.867,90.174) JP1.5@111.319,89.722 ; 110.867,89.534 ccw(c110.867,90.174) JP1.5@111.319,89.722 ; 110.867,89.534 ccw(c110.867,90.174) JP1.5@111.319,89.722 ; 110.867,89.534 ccw(c110.867,90.174) JP1.5@111.319,89.722 ; 110.867,89.534 ccw(c110.867,90.174) JP1.5@111.319,89.722 ; 110.872,89.534 cw(c110.872,88.393) JP1.5@111.679,89.2 ; 110.872,89.534 cw(c110.872,88.393) JP1.5@111.679,89.2 ; 110.872,89.534 cw(c110.872,88.393) JP1.5@111.679,89.2 ; 110.872,89.534 cw(c110.872,88.393) JP1.5@111.679,89.2 ; 110.872,89.534 cw(c110.872,88.393) JP1.5@111.679,89.2 ; 110.872,89.534 cw(c110.872,88.393) JP1.5@111.679,89.2 ; 110.872,89.534 cw(c110.872,88.393) JP1.5@111.679,89.2 ; 110.872,89.534 cw(c110.872,88.393) JP1.5@111.679,89.2 ; 110.872,89.534 cw(c110.872,88.393) JP1.5@111.679,89.2 ; 110.872,89.534 cw(c110.872,88.393) JP1.5@111.679,89.2
  Bottom Layer w0.254: ?.6@97.028,89.408 102.467,89.408 ccw(c102.467,91.041) U1.36@103.622,89.886 ; 103.076,89.408 cw(c103.076,88.636) U1.36@103.622,89.182 ; 103.08,89.408 ccw(c103.08,90.427) U1.36@103.801,89.707 ; U1.36@104.01,89.408 U1.36@104.136,89.534 ; ?.6@97.289,89.147 cw(c97.919,88.517) 97.919,89.408 ; ?.6@97.289,89.147 cw(c97.919,88.517) 97.919,89.408 ; ?.6@97.289,89.147 cw(c97.919,88.517) 97.919,89.408 ; ?.6@97.289,89.147 cw(c97.919,88.517) 97.919,89.408 ; ?.6@97.289,89.669 ccw(c97.919,90.299) 97.919,89.408 ; ?.6@97.289,89.669 ccw(c97.919,90.299) 97.919,89.408 ; ?.6@97.289,89.669 ccw(c97.919,90.299) 97.919,89.408 ; ?.6@97.289,89.669 ccw(c97.919,90.299) 97.919,89.408 ; ?.6@97.469,88.967 cw(c98.532,87.904) 98.532,89.408 ; ?.6@97.469,88.967 cw(c98.532,87.904) 98.532,89.408 ; ?.6@97.469,88.967 cw(c98.532,87.904) 98.532,89.408 ; ?.6@97.469,88.967 cw(c98.532,87.904) 98.532,89.408 ; ?.6@97.469,89.849 ccw(c98.532,90.912) 98.532,89.408 ; ?.6@97.469,89.849 ccw(c98.532,90.912) 98.532,89.408 ; ?.6@97.469,89.849 ccw(c98.532,90.912) 98.532,89.408 ; ?.6@97.469,89.849 ccw(c98.532,90.912) 98.532,89.408
NetJP1_6: ?.5 JP1.6 U1.35 | length 99.4
  Top Layer w0.254: U1.35@104.136,86.994 111.507,86.994 JP1.6@111.76,86.741 ; U1.35@104.471,87.294 ccw(c105.194,88.017) 105.194,86.994 ; U1.35@104.471,87.294 ccw(c105.194,88.017) 105.194,86.994 ; U1.35@104.471,87.294 ccw(c105.194,88.017) 105.194,86.994 ; U1.35@104.471,87.294 ccw(c105.194,88.017) 105.194,86.994 ; U1.35@104.651,86.642 cw(c105.501,85.792) 105.501,86.994 ; U1.35@104.651,86.642 cw(c105.501,85.792) 105.501,86.994 ; U1.35@104.651,86.642 cw(c105.501,85.792) 105.501,86.994 ; U1.35@104.651,86.642 cw(c105.501,85.792) 105.501,86.994 ; U1.35@104.651,86.642 cw(c105.501,85.792) 105.501,86.994 ; U1.35@104.651,86.642 cw(c105.501,85.792) 105.501,86.994 ; U1.35@104.651,86.769 cw(c105.194,86.225) 105.194,86.994 ; U1.35@104.651,86.769 cw(c105.194,86.225) 105.194,86.994 ; U1.35@104.651,86.769 cw(c105.194,86.225) 105.194,86.994 ; U1.35@104.651,86.769 cw(c105.194,86.225) 105.194,86.994 ; U1.35@104.651,87.346 ccw(c105.501,88.196) 105.501,86.994 ; U1.35@104.651,87.346 ccw(c105.501,88.196) 105.501,86.994 ; U1.35@104.651,87.346 ccw(c105.501,88.196) 105.501,86.994 ; U1.35@104.651,87.346 ccw(c105.501,88.196) 105.501,86.994 ; U1.35@104.651,87.346 ccw(c105.501,88.196) 105.501,86.994 ; U1.35@104.651,87.346 ccw(c105.501,88.196) 105.501,86.994 ; U1.35@104.651,87.473 ccw(c105.807,88.63) 105.807,86.994 ; U1.35@104.651,87.473 ccw(c105.807,88.63) 105.807,86.994 ; U1.35@104.651,87.473 ccw(c105.807,88.63) 105.807,86.994 ; U1.35@104.651,87.473 ccw(c105.807,88.63) 105.807,86.994 ; 109.645,86.994 cw(c109.645,84.626) JP1.6@111.319,86.3 ; 109.645,86.994 cw(c109.645,84.626) JP1.6@111.319,86.3 ; 109.645,86.994 cw(c109.645,84.626) JP1.6@111.319,86.3 ; 109.645,86.994 cw(c109.645,84.626) JP1.6@111.319,86.3 ; 109.645,86.994 cw(c109.645,84.626) JP1.6@111.319,86.3 ; 109.645,86.994 cw(c109.645,84.626) JP1.6@111.319,86.3 ; 109.645,86.994 cw(c109.645,84.626) JP1.6@111.319,86.3 ; 109.645,86.994 cw(c109.645,84.626) JP1.6@111.319,86.3 ; 109.645,86.994 cw(c109.645,84.626) JP1.6@111.319,86.3 ; 109.645,86.994 cw(c109.645,84.626) JP1.6@111.319,86.3 ; 110.258,86.994 cw(c110.258,85.239) JP1.6@111.499,86.48 ; 110.258,86.994 cw(c110.258,85.239) JP1.6@111.499,86.48 ; 110.258,86.994 cw(c110.258,85.239) JP1.6@111.499,86.48 ; 110.258,86.994 cw(c110.258,85.239) JP1.6@111.499,86.48 ; 110.258,86.994 cw(c110.258,85.239) JP1.6@111.499,86.48 ; 110.258,86.994 cw(c110.258,85.239) JP1.6@111.499,86.48 ; 110.258,86.994 cw(c110.258,85.239) JP1.6@111.499,86.48 ; 110.258,86.994 cw(c110.258,85.239) JP1.6@111.499,86.48 ; 110.258,86.994 cw(c110.258,85.239) JP1.6@111.499,86.48 ; 110.258,86.994 cw(c110.258,85.239) JP1.6@111.499,86.48 ; 110.867,86.994 ccw(c110.867,87.634) JP1.6@111.319,87.182 ; 110.867,86.994 ccw(c110.867,87.634) JP1.6@111.319,87.182 ; 110.867,86.994 ccw(c110.867,87.634) JP1.6@111.319,87.182 ; 110.867,86.994 ccw(c110.867,87.634) JP1.6@111.319,87.182 ; 110.867,86.994 ccw(c110.867,87.634) JP1.6@111.319,87.182 ; 110.867,86.994 ccw(c110.867,87.634) JP1.6@111.319,87.182 ; 110.867,86.994 ccw(c110.867,87.634) JP1.6@111.319,87.182 ; 110.867,86.994 ccw(c110.867,87.634) JP1.6@111.319,87.182 ; 110.867,86.994 ccw(c110.867,87.634) JP1.6@111.319,87.182 ; 110.867,86.994 ccw(c110.867,87.634) JP1.6@111.319,87.182 ; 110.872,86.994 cw(c110.872,85.853) JP1.6@111.679,86.66 ; 110.872,86.994 cw(c110.872,85.853) JP1.6@111.679,86.66 ; 110.872,86.994 cw(c110.872,85.853) JP1.6@111.679,86.66 ; 110.872,86.994 cw(c110.872,85.853) JP1.6@111.679,86.66 ; 110.872,86.994 cw(c110.872,85.853) JP1.6@111.679,86.66 ; 110.872,86.994 cw(c110.872,85.853) JP1.6@111.679,86.66 ; 110.872,86.994 cw(c110.872,85.853) JP1.6@111.679,86.66 ; 110.872,86.994 cw(c110.872,85.853) JP1.6@111.679,86.66 ; 110.872,86.994 cw(c110.872,85.853) JP1.6@111.679,86.66 ; 110.872,86.994 cw(c110.872,85.853) JP1.6@111.679,86.66
  Bottom Layer w0.254: ?.5@97.028,86.868 102.467,86.868 ccw(c102.467,88.501) U1.35@103.622,87.346 ; 103.076,86.868 cw(c103.076,86.096) U1.35@103.622,86.642 ; 103.08,86.868 ccw(c103.08,87.887) U1.35@103.801,87.167 ; ?.5@97.289,86.607 cw(c97.919,85.977) 97.919,86.868 ; ?.5@97.289,86.607 cw(c97.919,85.977) 97.919,86.868 ; ?.5@97.289,86.607 cw(c97.919,85.977) 97.919,86.868 ; ?.5@97.289,86.607 cw(c97.919,85.977) 97.919,86.868 ; ?.5@97.289,87.129 ccw(c97.919,87.759) 97.919,86.868 ; ?.5@97.289,87.129 ccw(c97.919,87.759) 97.919,86.868 ; ?.5@97.289,87.129 ccw(c97.919,87.759) 97.919,86.868 ; ?.5@97.289,87.129 ccw(c97.919,87.759) 97.919,86.868 ; ?.5@97.469,86.427 cw(c98.532,85.364) 98.532,86.868 ; ?.5@97.469,86.427 cw(c98.532,85.364) 98.532,86.868 ; ?.5@97.469,86.427 cw(c98.532,85.364) 98.532,86.868 ; ?.5@97.469,86.427 cw(c98.532,85.364) 98.532,86.868 ; ?.5@97.469,87.309 ccw(c98.532,88.372) 98.532,86.868 ; ?.5@97.469,87.309 ccw(c98.532,88.372) 98.532,86.868 ; ?.5@97.469,87.309 ccw(c98.532,88.372) 98.532,86.868 ; ?.5@97.469,87.309 ccw(c98.532,88.372) 98.532,86.868
NetJP1_7: ?.4 JP1.7 U1.34 | length 116.6
  Top Layer w0.254: U1.34@104.136,84.454 111.507,84.454 JP1.7@111.76,84.201 ; U1.34@104.424,84.167 cw(c105.117,83.473) 105.117,84.454 ; U1.34@104.424,84.167 cw(c105.117,83.473) 105.117,84.454 ; U1.34@104.424,84.167 cw(c105.117,83.473) 105.117,84.454 ; U1.34@104.424,84.167 cw(c105.117,83.473) 105.117,84.454 ; U1.34@104.424,84.167 cw(c105.117,83.473) 105.117,84.454 ; U1.34@104.424,84.167 cw(c105.117,83.473) 105.117,84.454 ; U1.34@104.424,84.741 ccw(c105.117,85.435) 105.117,84.454 ; U1.34@104.424,84.741 ccw(c105.117,85.435) 105.117,84.454 ; U1.34@104.424,84.741 ccw(c105.117,85.435) 105.117,84.454 ; U1.34@104.424,84.741 ccw(c105.117,85.435) 105.117,84.454 ; U1.34@104.424,84.741 ccw(c105.117,85.435) 105.117,84.454 ; U1.34@104.424,84.741 ccw(c105.117,85.435) 105.117,84.454 ; U1.34@104.424,84.868 ccw(c105.424,85.869) 105.424,84.454 ; U1.34@104.424,84.868 ccw(c105.424,85.869) 105.424,84.454 ; U1.34@104.424,84.868 ccw(c105.424,85.869) 105.424,84.454 ; U1.34@104.424,84.868 ccw(c105.424,85.869) 105.424,84.454 ; U1.34@104.603,83.987 cw(c105.731,82.86) 105.731,84.454 ; U1.34@104.603,83.987 cw(c105.731,82.86) 105.731,84.454 ; U1.34@104.603,83.987 cw(c105.731,82.86) 105.731,84.454 ; U1.34@104.603,83.987 cw(c105.731,82.86) 105.731,84.454 ; U1.34@104.603,83.987 cw(c105.731,82.86) 105.731,84.454 ; U1.34@104.603,83.987 cw(c105.731,82.86) 105.731,84.454 ; U1.34@104.603,84.114 cw(c105.424,83.293) 105.424,84.454 ; U1.34@104.603,84.114 cw(c105.424,83.293) 105.424,84.454 ; U1.34@104.603,84.114 cw(c105.424,83.293) 105.424,84.454 ; U1.34@104.603,84.114 cw(c105.424,83.293) 105.424,84.454 ; U1.34@104.603,84.921 ccw(c105.731,86.048) 105.731,84.454 ; U1.34@104.603,84.921 ccw(c105.731,86.048) 105.731,84.454 ; U1.34@104.603,84.921 ccw(c105.731,86.048) 105.731,84.454 ; U1.34@104.603,84.921 ccw(c105.731,86.048) 105.731,84.454 ; U1.34@104.603,84.921 ccw(c105.731,86.048) 105.731,84.454 ; U1.34@104.603,84.921 ccw(c105.731,86.048) 105.731,84.454 ; U1.34@104.603,85.048 ccw(c106.037,86.482) 106.037,84.454 ; U1.34@104.603,85.048 ccw(c106.037,86.482) 106.037,84.454 ; U1.34@104.603,85.048 ccw(c106.037,86.482) 106.037,84.454 ; U1.34@104.603,85.048 ccw(c106.037,86.482) 106.037,84.454 ; 109.645,84.454 cw(c109.645,82.086) JP1.7@111.319,83.76 ; 109.645,84.454 cw(c109.645,82.086) JP1.7@111.319,83.76 ; 109.645,84.454 cw(c109.645,82.086) JP1.7@111.319,83.76 ; 109.645,84.454 cw(c109.645,82.086) JP1.7@111.319,83.76 ; 109.645,84.454 cw(c109.645,82.086) JP1.7@111.319,83.76 ; 109.645,84.454 cw(c109.645,82.086) JP1.7@111.319,83.76 ; 109.645,84.454 cw(c109.645,82.086) JP1.7@111.319,83.76 ; 109.645,84.454 cw(c109.645,82.086) JP1.7@111.319,83.76 ; 109.645,84.454 cw(c109.645,82.086) JP1.7@111.319,83.76 ; 109.645,84.454 cw(c109.645,82.086) JP1.7@111.319,83.76 ; 110.258,84.454 cw(c110.258,82.699) JP1.7@111.499,83.94 ; 110.258,84.454 cw(c110.258,82.699) JP1.7@111.499,83.94 ; 110.258,84.454 cw(c110.258,82.699) JP1.7@111.499,83.94 ; 110.258,84.454 cw(c110.258,82.699) JP1.7@111.499,83.94 ; 110.258,84.454 cw(c110.258,82.699) JP1.7@111.499,83.94 ; 110.258,84.454 cw(c110.258,82.699) JP1.7@111.499,83.94 ; 110.258,84.454 cw(c110.258,82.699) JP1.7@111.499,83.94 ; 110.258,84.454 cw(c110.258,82.699) JP1.7@111.499,83.94 ; 110.258,84.454 cw(c110.258,82.699) JP1.7@111.499,83.94 ; 110.258,84.454 cw(c110.258,82.699) JP1.7@111.499,83.94 ; 110.867,84.454 ccw(c110.867,85.094) JP1.7@111.319,84.642 ; 110.867,84.454 ccw(c110.867,85.094) JP1.7@111.319,84.642 ; 110.867,84.454 ccw(c110.867,85.094) JP1.7@111.319,84.642 ; 110.867,84.454 ccw(c110.867,85.094) JP1.7@111.319,84.642 ; 110.867,84.454 ccw(c110.867,85.094) JP1.7@111.319,84.642 ; 110.867,84.454 ccw(c110.867,85.094) JP1.7@111.319,84.642 ; 110.867,84.454 ccw(c110.867,85.094) JP1.7@111.319,84.642 ; 110.867,84.454 ccw(c110.867,85.094) JP1.7@111.319,84.642 ; 110.867,84.454 ccw(c110.867,85.094) JP1.7@111.319,84.642 ; 110.867,84.454 ccw(c110.867,85.094) JP1.7@111.319,84.642 ; 110.872,84.454 cw(c110.872,83.313) JP1.7@111.679,84.12 ; 110.872,84.454 cw(c110.872,83.313) JP1.7@111.679,84.12 ; 110.872,84.454 cw(c110.872,83.313) JP1.7@111.679,84.12 ; 110.872,84.454 cw(c110.872,83.313) JP1.7@111.679,84.12 ; 110.872,84.454 cw(c110.872,83.313) JP1.7@111.679,84.12 ; 110.872,84.454 cw(c110.872,83.313) JP1.7@111.679,84.12 ; 110.872,84.454 cw(c110.872,83.313) JP1.7@111.679,84.12 ; 110.872,84.454 cw(c110.872,83.313) JP1.7@111.679,84.12 ; 110.872,84.454 cw(c110.872,83.313) JP1.7@111.679,84.12 ; 110.872,84.454 cw(c110.872,83.313) JP1.7@111.679,84.12
  Bottom Layer w0.254: ?.4@97.155,84.328 102.238,84.328 ccw(c102.238,86.353) U1.34@103.669,84.921 ; 102.846,84.328 cw(c102.846,83.164) U1.34@103.669,83.987 ; 102.851,84.328 ccw(c102.851,85.739) U1.34@103.849,84.741 ; ?.4@97.289,84.067 cw(c97.919,83.437) 97.919,84.328 ; ?.4@97.289,84.067 cw(c97.919,83.437) 97.919,84.328 ; ?.4@97.289,84.067 cw(c97.919,83.437) 97.919,84.328 ; ?.4@97.289,84.067 cw(c97.919,83.437) 97.919,84.328 ; ?.4@97.289,84.589 ccw(c97.919,85.219) 97.919,84.328 ; ?.4@97.289,84.589 ccw(c97.919,85.219) 97.919,84.328 ; ?.4@97.289,84.589 ccw(c97.919,85.219) 97.919,84.328 ; ?.4@97.289,84.589 ccw(c97.919,85.219) 97.919,84.328 ; ?.4@97.469,83.887 cw(c98.532,82.824) 98.532,84.328 ; ?.4@97.469,83.887 cw(c98.532,82.824) 98.532,84.328 ; ?.4@97.469,83.887 cw(c98.532,82.824) 98.532,84.328 ; ?.4@97.469,83.887 cw(c98.532,82.824) 98.532,84.328 ; ?.4@97.469,84.769 ccw(c98.532,85.832) 98.532,84.328 ; ?.4@97.469,84.769 ccw(c98.532,85.832) 98.532,84.328 ; ?.4@97.469,84.769 ccw(c98.532,85.832) 98.532,84.328 ; ?.4@97.469,84.769 ccw(c98.532,85.832) 98.532,84.328
NetJP1_8: ?.3 JP1.8 U1.33 | length 99.4
  Top Layer w0.254: U1.33@104.136,81.914 111.507,81.914 JP1.8@111.76,81.661 ; U1.33@104.471,82.214 ccw(c105.194,82.937) 105.194,81.914 ; U1.33@104.471,82.214 ccw(c105.194,82.937) 105.194,81.914 ; U1.33@104.471,82.214 ccw(c105.194,82.937) 105.194,81.914 ; U1.33@104.471,82.214 ccw(c105.194,82.937) 105.194,81.914 ; U1.33@104.651,81.562 cw(c105.501,80.712) 105.501,81.914 ; U1.33@104.651,81.562 cw(c105.501,80.712) 105.501,81.914 ; U1.33@104.651,81.562 cw(c105.501,80.712) 105.501,81.914 ; U1.33@104.651,81.562 cw(c105.501,80.712) 105.501,81.914 ; U1.33@104.651,81.562 cw(c105.501,80.712) 105.501,81.914 ; U1.33@104.651,81.562 cw(c105.501,80.712) 105.501,81.914 ; U1.33@104.651,81.689 cw(c105.194,81.145) 105.194,81.914 ; U1.33@104.651,81.689 cw(c105.194,81.145) 105.194,81.914 ; U1.33@104.651,81.689 cw(c105.194,81.145) 105.194,81.914 ; U1.33@104.651,81.689 cw(c105.194,81.145) 105.194,81.914 ; U1.33@104.651,82.266 ccw(c105.501,83.116) 105.501,81.914 ; U1.33@104.651,82.266 ccw(c105.501,83.116) 105.501,81.914 ; U1.33@104.651,82.266 ccw(c105.501,83.116) 105.501,81.914 ; U1.33@104.651,82.266 ccw(c105.501,83.116) 105.501,81.914 ; U1.33@104.651,82.266 ccw(c105.501,83.116) 105.501,81.914 ; U1.33@104.651,82.266 ccw(c105.501,83.116) 105.501,81.914 ; U1.33@104.651,82.393 ccw(c105.807,83.55) 105.807,81.914 ; U1.33@104.651,82.393 ccw(c105.807,83.55) 105.807,81.914 ; U1.33@104.651,82.393 ccw(c105.807,83.55) 105.807,81.914 ; U1.33@104.651,82.393 ccw(c105.807,83.55) 105.807,81.914 ; 109.645,81.914 cw(c109.645,79.546) JP1.8@111.319,81.22 ; 109.645,81.914 cw(c109.645,79.546) JP1.8@111.319,81.22 ; 109.645,81.914 cw(c109.645,79.546) JP1.8@111.319,81.22 ; 109.645,81.914 cw(c109.645,79.546) JP1.8@111.319,81.22 ; 109.645,81.914 cw(c109.645,79.546) JP1.8@111.319,81.22 ; 109.645,81.914 cw(c109.645,79.546) JP1.8@111.319,81.22 ; 109.645,81.914 cw(c109.645,79.546) JP1.8@111.319,81.22 ; 109.645,81.914 cw(c109.645,79.546) JP1.8@111.319,81.22 ; 109.645,81.914 cw(c109.645,79.546) JP1.8@111.319,81.22 ; 109.645,81.914 cw(c109.645,79.546) JP1.8@111.319,81.22 ; 110.258,81.914 cw(c110.258,80.159) JP1.8@111.499,81.4 ; 110.258,81.914 cw(c110.258,80.159) JP1.8@111.499,81.4 ; 110.258,81.914 cw(c110.258,80.159) JP1.8@111.499,81.4 ; 110.258,81.914 cw(c110.258,80.159) JP1.8@111.499,81.4 ; 110.258,81.914 cw(c110.258,80.159) JP1.8@111.499,81.4 ; 110.258,81.914 cw(c110.258,80.159) JP1.8@111.499,81.4 ; 110.258,81.914 cw(c110.258,80.159) JP1.8@111.499,81.4 ; 110.258,81.914 cw(c110.258,80.159) JP1.8@111.499,81.4 ; 110.258,81.914 cw(c110.258,80.159) JP1.8@111.499,81.4 ; 110.258,81.914 cw(c110.258,80.159) JP1.8@111.499,81.4 ; 110.867,81.914 ccw(c110.867,82.554) JP1.8@111.319,82.102 ; 110.867,81.914 ccw(c110.867,82.554) JP1.8@111.319,82.102 ; 110.867,81.914 ccw(c110.867,82.554) JP1.8@111.319,82.102 ; 110.867,81.914 ccw(c110.867,82.554) JP1.8@111.319,82.102 ; 110.867,81.914 ccw(c110.867,82.554) JP1.8@111.319,82.102 ; 110.867,81.914 ccw(c110.867,82.554) JP1.8@111.319,82.102 ; 110.867,81.914 ccw(c110.867,82.554) JP1.8@111.319,82.102 ; 110.867,81.914 ccw(c110.867,82.554) JP1.8@111.319,82.102 ; 110.867,81.914 ccw(c110.867,82.554) JP1.8@111.319,82.102 ; 110.867,81.914 ccw(c110.867,82.554) JP1.8@111.319,82.102 ; 110.872,81.914 cw(c110.872,80.773) JP1.8@111.679,81.58 ; 110.872,81.914 cw(c110.872,80.773) JP1.8@111.679,81.58 ; 110.872,81.914 cw(c110.872,80.773) JP1.8@111.679,81.58 ; 110.872,81.914 cw(c110.872,80.773) JP1.8@111.679,81.58 ; 110.872,81.914 cw(c110.872,80.773) JP1.8@111.679,81.58 ; 110.872,81.914 cw(c110.872,80.773) JP1.8@111.679,81.58 ; 110.872,81.914 cw(c110.872,80.773) JP1.8@111.679,81.58 ; 110.872,81.914 cw(c110.872,80.773) JP1.8@111.679,81.58 ; 110.872,81.914 cw(c110.872,80.773) JP1.8@111.679,81.58 ; 110.872,81.914 cw(c110.872,80.773) JP1.8@111.679,81.58
  Bottom Layer w0.254: ?.3@97.028,81.788 102.467,81.788 ccw(c102.467,83.421) U1.33@103.622,82.266 ; 103.076,81.788 cw(c103.076,81.016) U1.33@103.622,81.562 ; 103.08,81.788 ccw(c103.08,82.807) U1.33@103.801,82.087 ; ?.3@97.289,81.527 cw(c97.919,80.897) 97.919,81.788 ; ?.3@97.289,81.527 cw(c97.919,80.897) 97.919,81.788 ; ?.3@97.289,81.527 cw(c97.919,80.897) 97.919,81.788 ; ?.3@97.289,81.527 cw(c97.919,80.897) 97.919,81.788 ; ?.3@97.289,82.049 ccw(c97.919,82.679) 97.919,81.788 ; ?.3@97.289,82.049 ccw(c97.919,82.679) 97.919,81.788 ; ?.3@97.289,82.049 ccw(c97.919,82.679) 97.919,81.788 ; ?.3@97.289,82.049 ccw(c97.919,82.679) 97.919,81.788 ; ?.3@97.469,81.347 cw(c98.532,80.284) 98.532,81.788 ; ?.3@97.469,81.347 cw(c98.532,80.284) 98.532,81.788 ; ?.3@97.469,81.347 cw(c98.532,80.284) 98.532,81.788 ; ?.3@97.469,81.347 cw(c98.532,80.284) 98.532,81.788 ; ?.3@97.469,82.229 ccw(c98.532,83.292) 98.532,81.788 ; ?.3@97.469,82.229 ccw(c98.532,83.292) 98.532,81.788 ; ?.3@97.469,82.229 ccw(c98.532,83.292) 98.532,81.788 ; ?.3@97.469,82.229 ccw(c98.532,83.292) 98.532,81.788